# Altium PCB buck_chw_v3.0.PcbDoc
Units mil, origin at the board's own origin, x right, y up, seen from the top; angles counter-clockwise.
Board outline 1810.03 x 2000.03 mil, 2 copper layers (Top Layer, Bottom Layer); 18 components, 11 nets, 44 pads, 0 vias.
Unrouted connection lines stored in the file: 14.
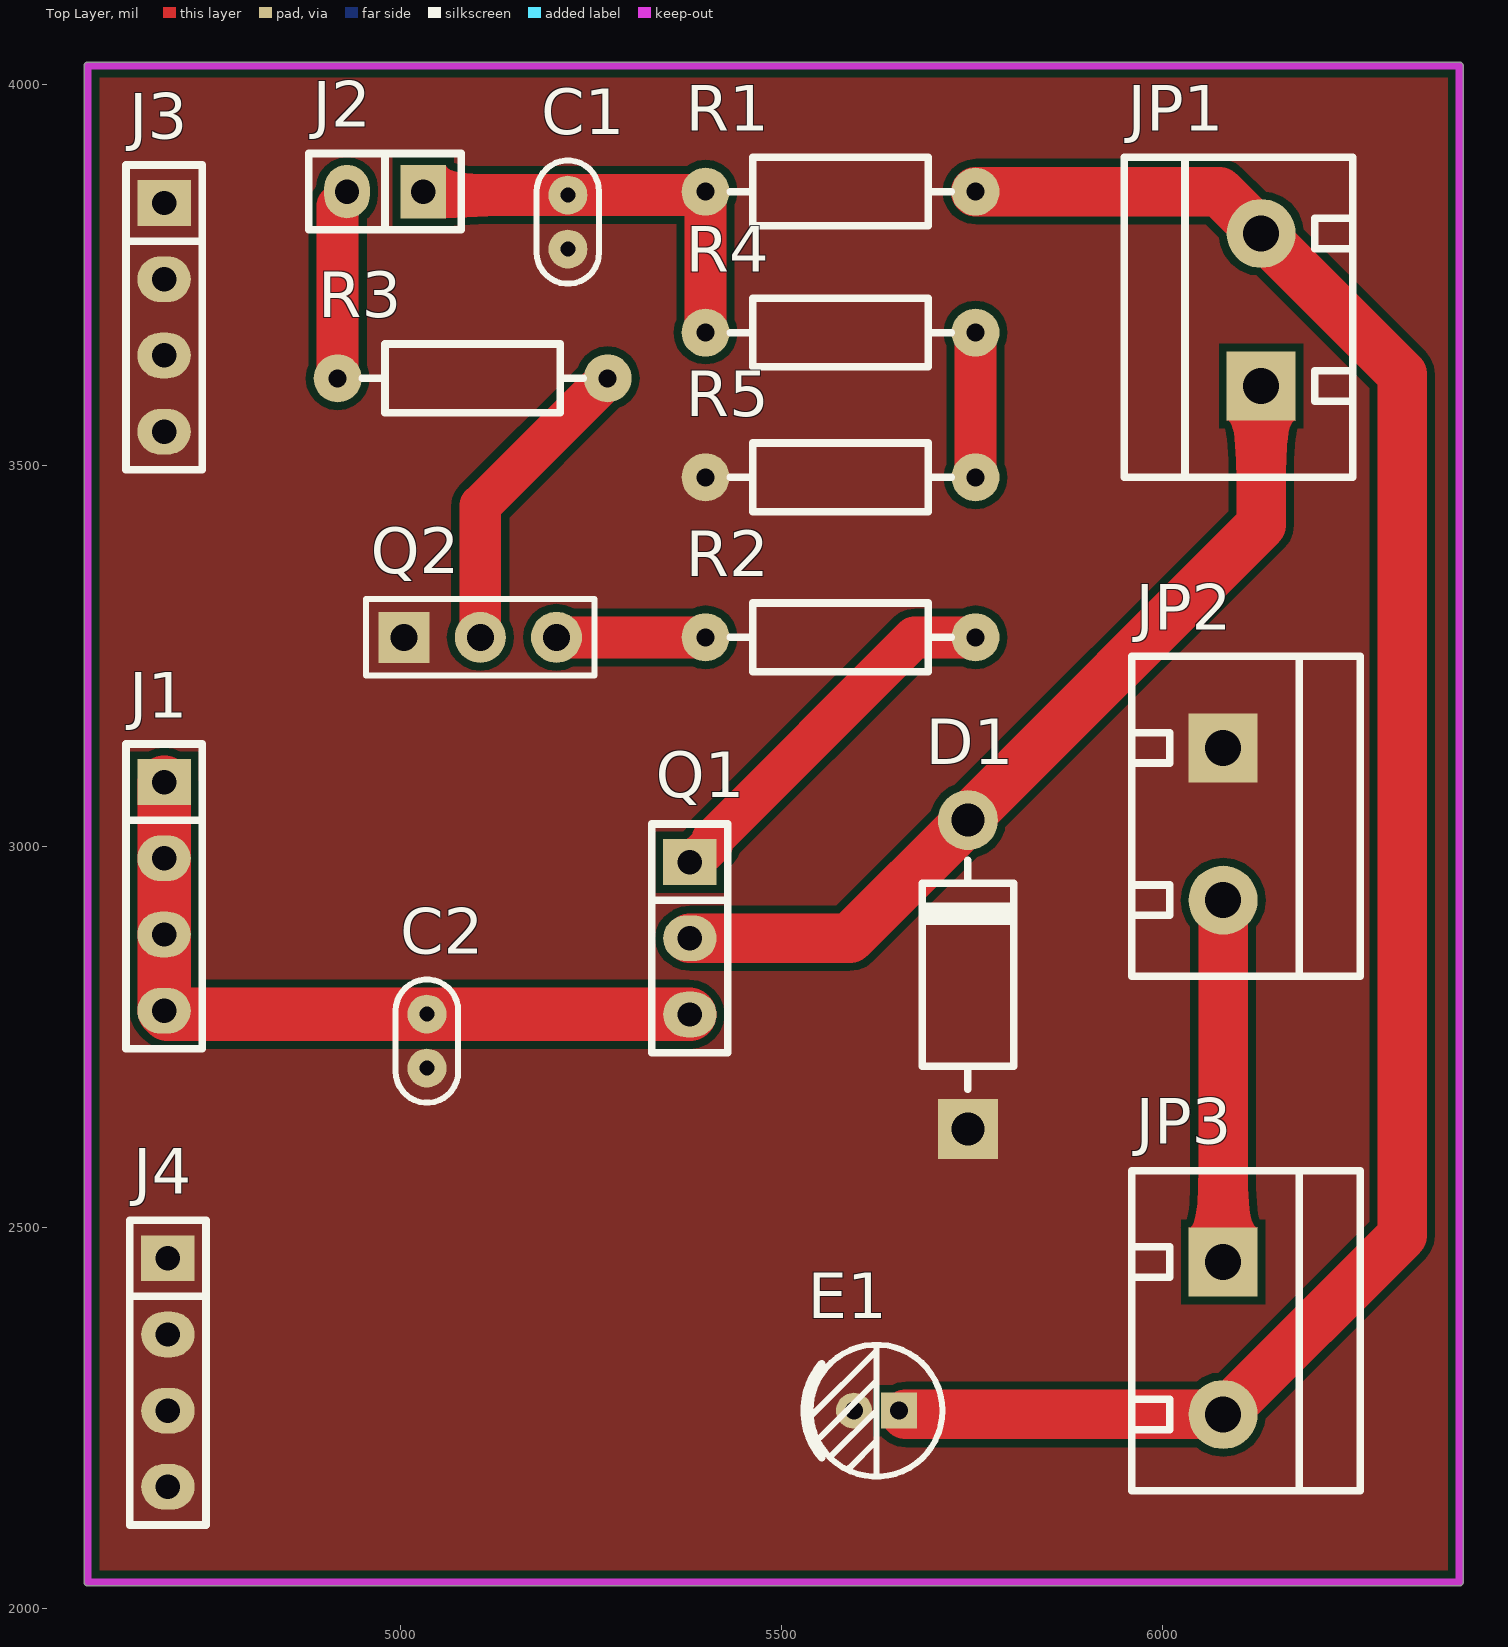
[diagram p0: Top Layer view]
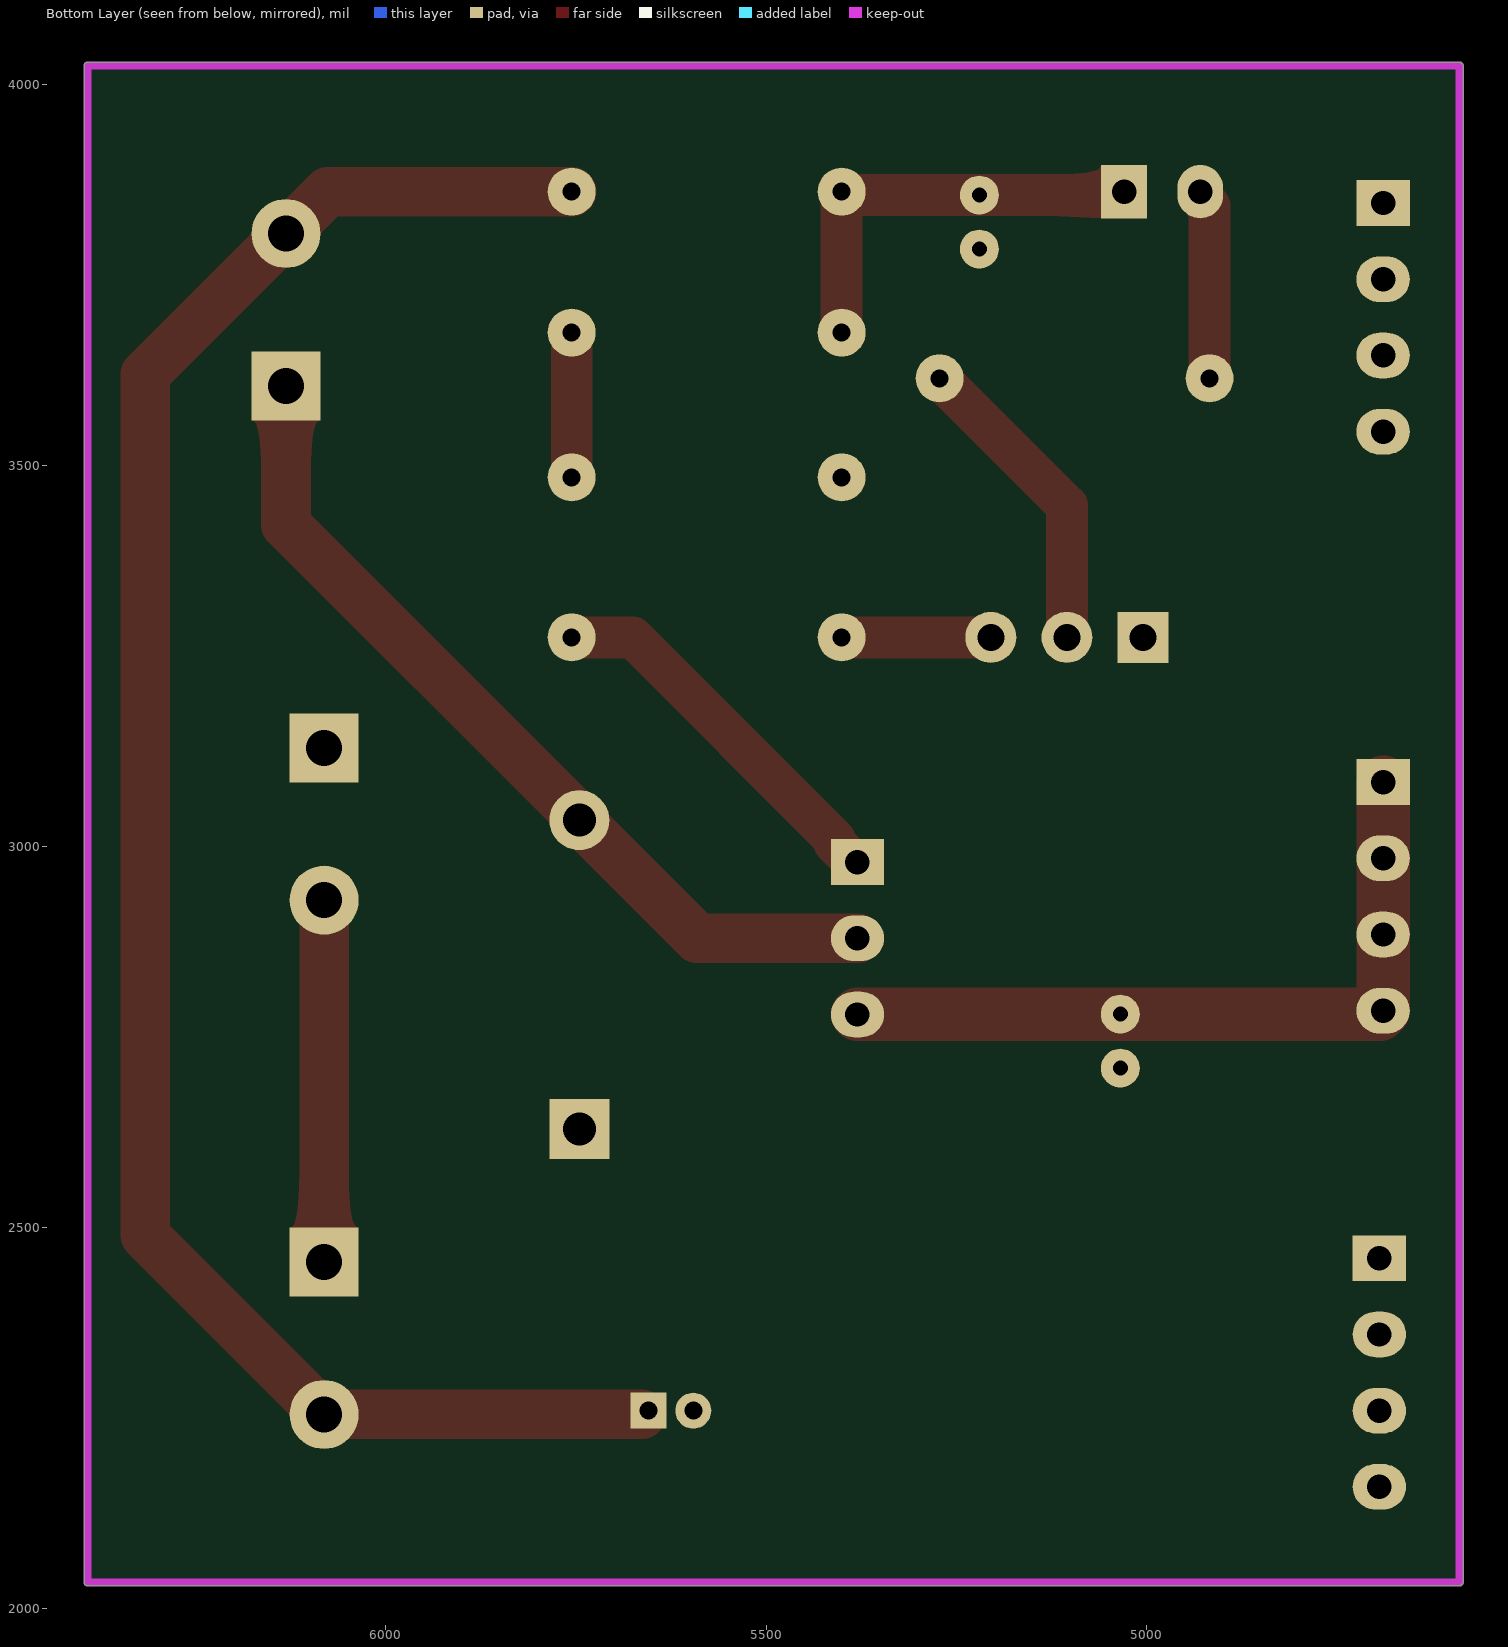
[diagram p1: Bottom Layer view, seen from below]

## Layer stack, top to bottom
Top Solder: solder mask 0.4, Solder Resist, Dk 3.5
Top Layer: signal copper 1.4
Dielectric 1: dielectric 12.6, FR-4, Dk 4.8
Bottom Layer: signal copper 1.4
Bottom Solder: solder mask 0.4, Solder Resist, Dk 3.5

## Board outline
4584.98,2035 ccw(c4590,2035) 4590,2029.98 6390,2029.98 ccw(c6390,2035) 6395.02,2035 6395.01,4025 ccw(c6390,4025) 6390,4030.01 4590,4030.01 ccw(c4590,4025) 4584.98,4025

## Design rules (kind name [scope] priority, off if disabled: settings)
Clearance [All] p1: gap=10 ignorepadtopadclearanceinfootprint=FALSE except(0: Arc-Hole Track-Hole SMDPad-Hole THPad-Hole Via-Hole Fill-Hole Poly-Hole Region-Hole Text-Hole)
PolygonConnect [All] p1: connectstyle=Direct reliefconductorwidth=10 reliefentries=4 polygonreliefangle="90 Angle" airgapwidth=10
RoutingVias [All] p1: holewidth=28 width=50 viastyle="Through Hole" minholewidth=28 minwidth=50 maxholewidth=28 maxwidth=50
SolderMaskExpansion [All] p1: expansion=4 istentingtop=FALSE
Width [All] p1: maxlimit=200 minlimit=10 preferedwidth=10 minimp=50.000000 maximp=50.000000 favimp=50.000000
30 further rules are at their usual default settings.

## Components (designator, comment, footprint, x,y, rotation, side; value= is the part's Value field where it differs from the comment)
C1 "104" "CC 1.8*3.6" 5220,3820 r270 top
C2 "104" "CC 1.8*3.6" 5035,2745 r270 top
D1 "1N4007" DO-15 5745,2629.49 r90 top
E1 "470uF/16V" "CAP 1.5*4*8" 5625,2260 r180 top
J1 "Pin HDR1X4" "Pin HDR1X4/2.54mm-S" 4690,3085 r0 top
J2 "Pin HDR1X2" "Pin HDR1X2/2.54mm-S" 5030,3860 r270 top
J3 "Pin HDR1X4" "Pin HDR1X4/2.54mm-S" 4690,3845 r0 top
J4 "Pin HDR1X4" "Pin HDR1X4/2.54mm-S" 4695,2460 r0 top
JP1 "HDR-1X2" KF301-5.0-2P 6130,3605 r90 top
JP2 "HDR-1X2" KF301-5.0-2P 6080,3130 r270 top
JP3 "HDR-1X2" KF301-5.0-2P 6080,2455 r270 top
Q1 "TIP42C" Fe-HDR1X3/2.54-S 5380,2980 r0 top
Q2 "NPN" HDR2.54-Y-LI-3P 5105,3275 r0 top
R1 "10K" "RS 1/4W" 5577.83,3860 r0 top
R2 "680Ω" "RS 1/4W" 5577.83,3275 r0 top
R3 "680Ω" "RS 1/4W" 5095,3615 r0 top
R4 "1K" "RS 1/4W" 5577.83,3675 r180 top
R5 "1K" "RS 1/4W" 5577.83,3485 r0 top

## Footprints (in the part's own frame and the unit in brackets; to place one, negate y for a bottom-side part, rotate by r counter-clockwise, add the part's x,y. Pads: shape width x height; smd on the part's side, far side on the other; paste and mask are expansions set on the pad)
"CAP 1.5*4*8" [mm] "脚距1.5mm直径4mm高度8mm"
  rect 1.2x1.2 hole 0.6: 1(-0.75,0)
  round 1.2 hole 0.6: 2(0.75,0)
  silkscreen extent -2.2,-2.2 2.41,2.2, body extent -2,-2 2.02,2, height 8.04
"CC 1.8*3.6" [mm] "脚距1.8mm直径3.6mm"
  round 1.3 hole 0.5: 1(-0.9,0) 2(0.9,0)
  silkscreen extent -2.05,-1.04 2.05,1.04, body extent -1.8,-0.8 1.8,0.8, height 3.6
DO-15 [mm]
  rect 2x2 hole 1.1: A(0,0)
  round 2 hole 1.1: K(10.3,0)
  silkscreen extent 1.34,-1.52 8.96,1.52, body extent -0.34,-1.65 10.76,1.65, height 3.35
Fe-HDR1X3/2.54-S [mil]
  rect 70x60 hole 32: 1(0,0)
  oval 70x60 hole 32: 2(0,-100) 3(0,-200)
  silkscreen extent -50,-250 50,50, body extent -50,-255 48,55, height 335
HDR2.54-Y-LI-3P [mm] "圆孔排母，3脚"
  rect 1.7x1.7 hole 0.9: 1(-2.54,0)
  round 1.7 hole 0.9: 2(0,0) 3(2.54,0)
  silkscreen extent -3.81,-1.27 3.81,1.27, body extent -3.81,-1.27 3.81,1.27, height 4.31
KF301-5.0-2P [mm] "可拼接端子/6A"
  rect 2.3x2.3 hole 1.2: 1(0,0)
  round 2.3 hole 1.2: 2(5.08,0)
  silkscreen extent -3.05,-3.05 7.62,4.57, body extent -3,-3.09 7.5,4.51, height 10.05
"Pin HDR1X2/2.54mm-S" [mil]
  rect 70x60 hole 32: 1(0,0)
  oval 70x60 hole 32: 2(0,-100)
  silkscreen extent -50,-150 50,50, body extent -50,-150 50,50, height 336
"Pin HDR1X4/2.54mm-S" [mil]
  rect 70x60 hole 32: 1(0,0)
  oval 70x60 hole 32: 2(0,-100) 3(0,-200) 4(0,-300)
  silkscreen extent -50,-350 50,50, body extent -50,-350 50,50, height 336
"RS 1/4W" [mm] "直插色环电阻，脚距9mm，直径2.3mm"
  round 1.6 hole 0.6: 1(-4.5,0) 2(4.5,0)
  silkscreen extent -3.68,-1.14 3.68,1.14, body extent -4.72,-1.16 4.73,1.16, height 2.32

## Part data
C1 C2: library part C-CC, "直插瓷片电容", BOM名称=直插瓷片电容, 版权归属=源创客, 学习资源=www.ooocke.com
D1: library part "DIODE SCHOTTKY", "肖特基二极管"
E1: library part C-CAP, "直插电解电容", BOM名称=直插电解电容, 版权归属=源创客, 学习资源=www.ooocke.com
JP1 JP2 JP3: library part "Header 2", "2P接插件", BOM名称=2P接插件, 版权归属=源创客, 学习资源=www.ooocke.com
Q1: library part PNP, "PNP三极管"
Q2: "NPN三极管"
R1 R2 R3 R4 R5: library part R-CRR, "直插色环电阻", BOM名称=色环电阻, 版权归属=源创客, 学习资源=www.ooocke.com

## Nets (pads, with @x,y where several pads share a name; then routed paths per layer and width w, separated by ;. In a path a pad name is that pad's centre, name@x,y a point inside that pad or via, vN(x,y) a via of type N, cw(c..) or ccw(c..) an arc to the next point about the centre after c; other vN are vias at no path point)
"A IN": E1.1 JP1.2 JP3.2 R1.2 | length 2538.4
  Top Layer w65: E1.1@5663.31,2255 JP3.2 6315,2490 6315,3620 JP1.2 6075,3860 R1.2
"A OUT": JP2.2 JP3.1 | length 475
  Top Layer w65: JP3.1 JP2.2
ADC: C1.1 J2.1 R1.1 R4.2 | length 559.5
  Top Layer w55: J2.1 5034.57,3855.43 C1.1 5396.1,3855.43 R1.1 R4.2
GND: C1.2 C2.2 D1.A E1.2 J3.1 J3.2 J3.3 J3.4 J4.1 J4.2 J4.3 J4.4 JP2.1 Q2.1 R5.1
NetD1_K: D1.K JP1.1 Q1.2 | length 1158.7
  Top Layer w65: Q1.2 5590,2880 D1.K 5745,3037.87 6130,3422.87 JP1.1
NetQ1_B: Q1.1 R2.2 | length 500.1
  Top Layer w55: Q1.1 5385,2980 5410,3005 5410,3010 5675,3275 R2.2
NetQ2_B: Q2.2 R3.2 | length 409.2
  Top Layer w55: Q2.2 5105,3447.83 R3.2
NetQ2_C: Q2.3 R2.1 | length 195.7
  Top Layer w55: Q2.3 R2.1
NetR4_1: R4.1 R5.2 | length 190
  Top Layer w55: R5.2 R4.1
PWM: J2.2 R3.1 | length 250
  Top Layer w55: R3.1 4917.83,3841.48 4930,3853.65 J2.2
VCC: C2.1 J1.1 J1.2 J1.3 J1.4 Q1.3 | length 992.1
  Top Layer w70: J1.1 J1.2 J1.3 J1.4 4694.57,2780.43 5379.57,2780.43 Q1.3

## Polygon pours and split planes (outlines as drawn)
GND on Top Layer "NONET_L-01_P-001" (solid, remove dead copper, pour order 0): 4590,4025 6390,4025 6390,2035 4590,2035

## Keep-outs
Keep-Out Layer:
  lines w10: 4590,2035 6390,2035 6390,4025 4590,4025 4590,3935 4590,2035